# Altium PCB ArduinoUnoShield.PcbDoc
Units mm, origin at the board's own origin, x right, y up, seen from the top; angles counter-clockwise.
Board outline 68.58 x 53.34 mm, 3 copper layers (Top Layer, Mid-Layer 1, Bottom Layer); 62 components, 59 nets, 211 pads, 39 vias.
Unrouted connection lines stored in the file: 1.
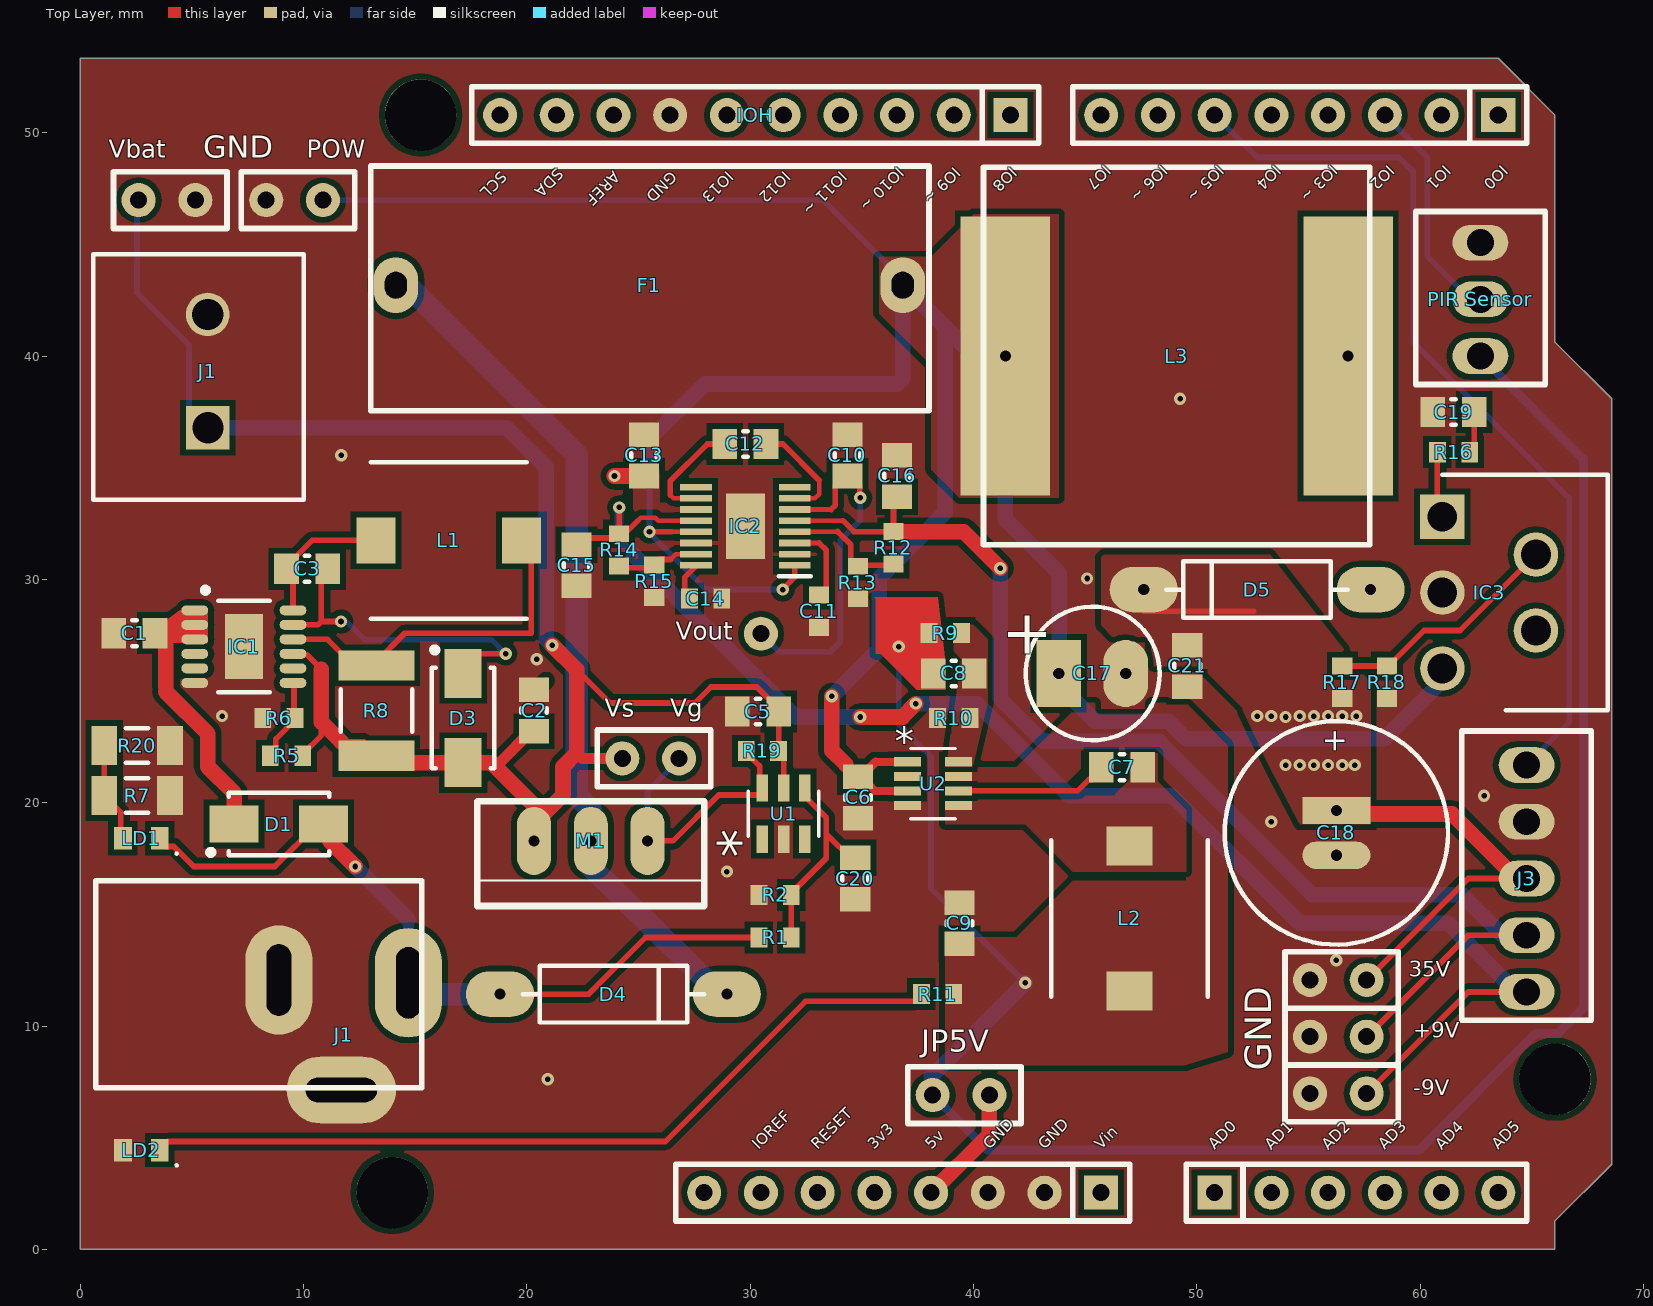
[diagram p0: Top Layer view]
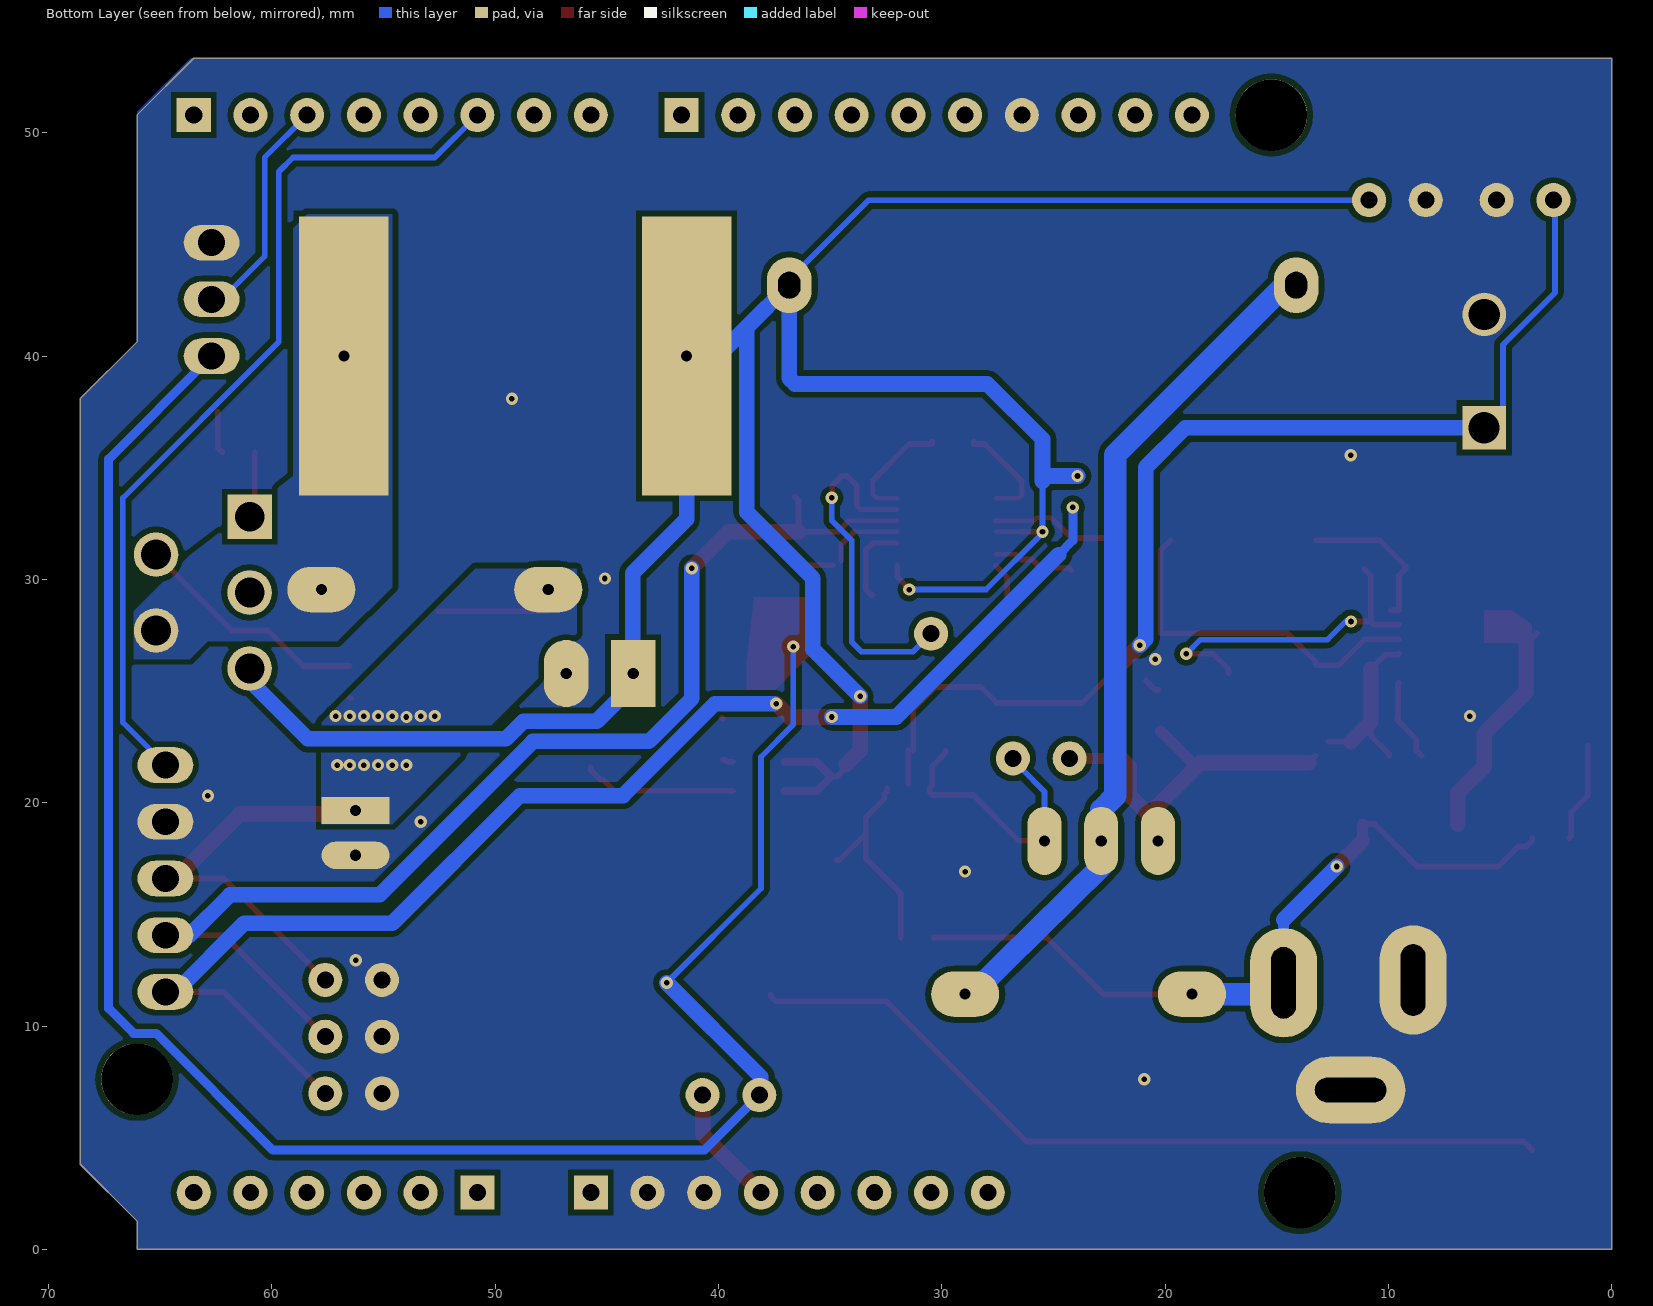
[diagram p1: Bottom Layer view, seen from below]
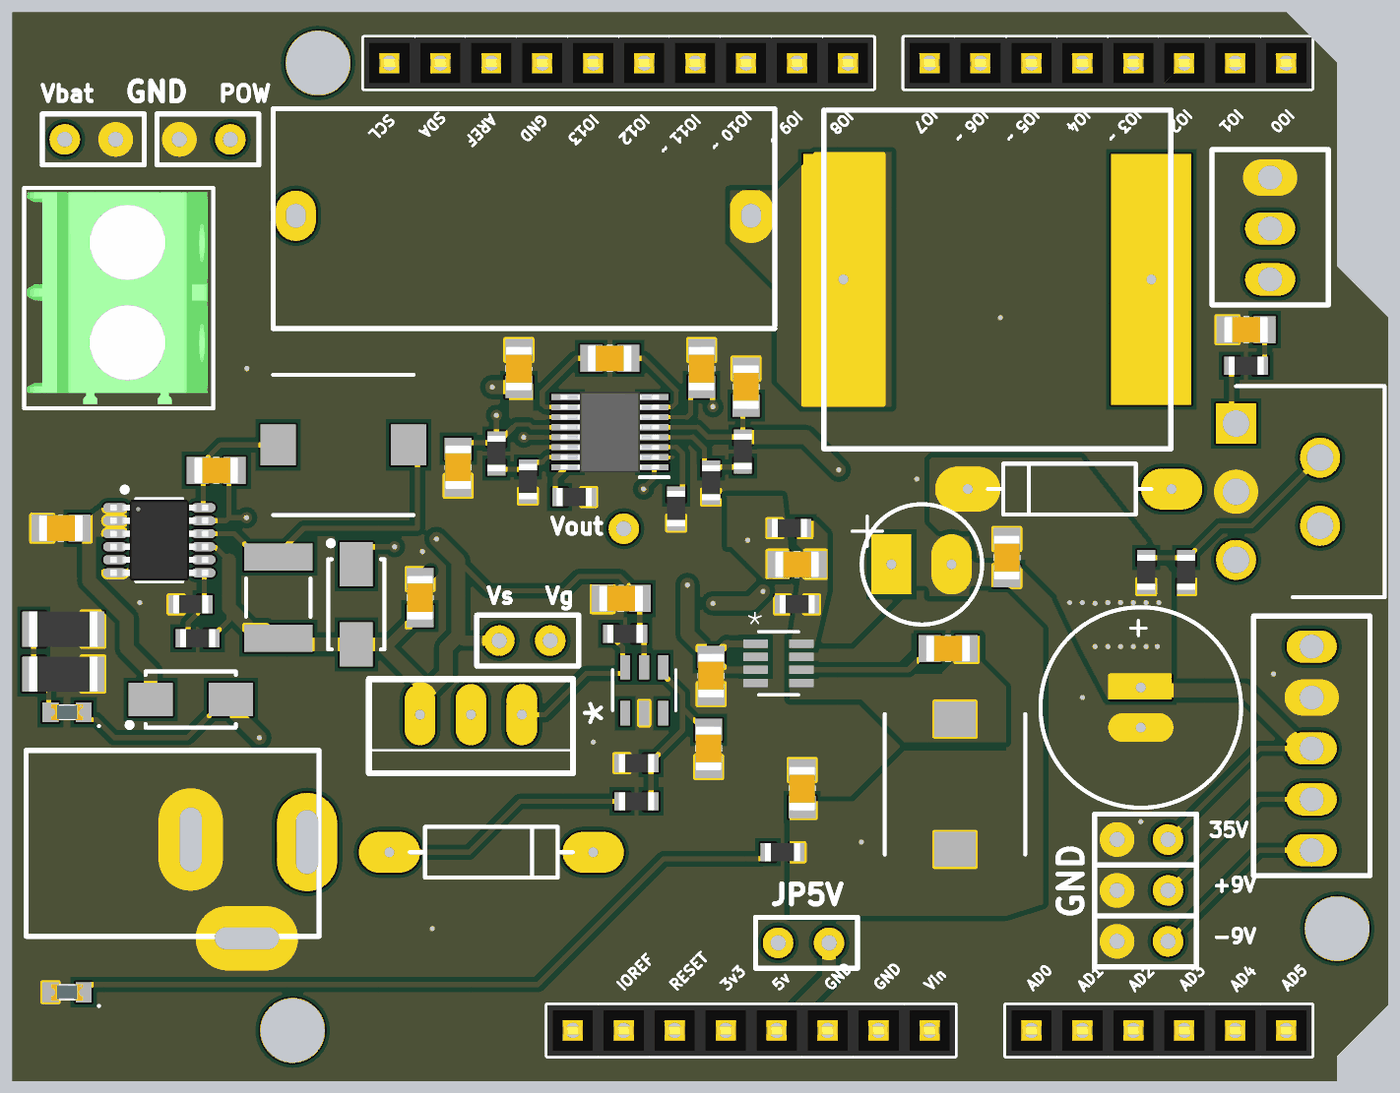
[diagram p2: 3D render of the assembled board from above, using the file's embedded part models]

## Layer stack, top to bottom
Top Solder: solder mask 0.0102, Solder Resist, Dk 3.5
Top Layer: signal copper 0.0356
Dielectric1: dielectric 0.32, FR-4, Dk 4.8
Mid-Layer 1: signal copper 0.0356
Dielectric2: dielectric 0.32, FR-4, Dk 4.8
Bottom Layer: signal copper 0.0356
Bottom Solder: solder mask 0.0102, Solder Resist, Dk 3.5

## Board outline
0,0 0,53.34 63.5,53.34 66.04,50.8 66.04,40.64 68.58,38.1 68.58,3.81 66.04,1.27 66.04,0

## Design rules (kind name [scope] priority, off if disabled: settings)
Clearance [All] p1: gap=0.254 ignorepadtopadclearanceinfootprint=TRUE except(0: Arc-Hole Track-Hole SMDPad-Hole THPad-Hole Via-Hole Fill-Hole Poly-Hole Region-Hole Text-Hole; 0.2: Arc-Arc Arc-Track Arc-SMDPad Track-Track Track-SMDPad)
PlaneConnect [All] p1: planeconnectstyle=Direct reliefexpansion=0.508 reliefentries=4 reliefconductorwidth=0.254 reliefairgap=0.254
PolygonConnect [All] p1: connectstyle=Direct reliefconductorwidth=0.254 reliefentries=4 polygonreliefangle="90 Angle" airgapwidth=0.254
RoomDefinition "Symetrical Power Supply" [InComponentClass('Symetrical Power Supply')] p1: confinementstyle=ConfineIn formatcopy=TRUE lockcomponents=FALSE outline 20.996,28.656 20.996,32.614 23.217,32.614 23.217,32.764 24.019,32.764 24.019,37.539 33.127,37.539 35.585,37.539 35.585,36.614 37.805,36.614 37.805,32.656 37.395,32.656 37.395,29.791 35.803,29.791 35.803,28.236 34.068,28.236 34.068,26.946 32.11,26.946 32.11,28.168 26.377,28.168 26.377,28.291 24.722,28.291 24.722,28.656
RoomDefinition Converter [InComponentClass('Converter')] p2: confinementstyle=ConfineIn formatcopy=TRUE lockcomponents=FALSE outline 0.851,3.404 0.851,5.474 29.277,27.537 37.106,28.574 40.364,28.574 62.536,27.537 62.536,5.956 4.671,3.404
RoomDefinition Boost [InComponentClass('Boost')] p3: confinementstyle=ConfineIn formatcopy=TRUE lockcomponents=FALSE outline 38.735,12.573 69.215,12.573 69.215,49.403 38.735,49.403
RoomDefinition ups [InComponentClass('ups')] p4: confinementstyle=ConfineIn formatcopy=TRUE lockcomponents=FALSE outline 0,0.635 51.435,0.635 51.435,52.705 0,52.705
RoutingVias [All] p1: holewidth=0.711 width=1.27 viastyle="Through Hole" minholewidth=0.711 minwidth=1.27 maxholewidth=0.711 maxwidth=1.27
SilkToSolderMaskClearance SilkscreenOverComponentPads [IsPad] p1: minsilkscreentomaskgap=0.254 clearancetoexposedcopper=TRUE
SolderMaskExpansion [All] p1: expansion=0.102
Width [All] p1: maxlimit=2 minlimit=0.2 preferedwidth=0.254 midlayer1_minwidth=0.254 bottomlayer_minwidth=0.254 minimp=50.000000 maximp=50.000000 favimp=50.000000
28 further rules are at their usual default settings.

## Classes and differential pairs
component class "Symetrical Power Supply": C10 C11 C12 C13 C14 C15 C16 IC2 R12 R13 R14 R15
component class Boost: C17 C18 C19 C21 D5 IC3 L3 R16 R17 R18
component class Converter: C6 C7 C8 C9 L2 LD2 R9 R10 R11 U2
component class ups: C1 C2 C3 C5 C20 D1 D3 D4 F1 IC1 J1 L1 LD1 M1 R1 R2 R5 R6 R7 R8 R19 R20 U1
component class ArduinoUnoShield: IOH J1 J3

## Components (designator, comment, footprint, x,y, rotation, side; value= is the part's Value field where it differs from the comment)
AD "AD" "Header 6x1 8.5mm" 50.8,2.54 r0 top locked
C1 "10uF" "0805 CAP" 2.42,27.595 r180 top
C2 "10uF" "0805 CAP" 20.32,24.13 r90 top
C3 "1uF" "0805 CAP" 10.16,30.48 r180 top
C5 "10uF" "0805 CAP" 30.346,24.084 r0 top
C6 "1uF" "0805 CAP" 34.832,20.241 r90 top
C7 "0.22uF" "0805 CAP" 46.645,21.59 r0 top
C8 "22pF" "0805 CAP" 39.116,25.796 r0 top
C9 "10uF" "0805 CAP" 39.37,14.605 r90 top
C10 "10uF" "0805 CAP" 34.356,35.56 r90 top
C11 "10nF" "0603 RES" 33.089,28.575 r90 top
C12 "1uF" "0805 CAP" 29.783,36.07 r180 top
C13 "10uF" "0805 CAP" 25.248,35.56 r270 top
C14 "10nF" "0603 RES" 28.006,29.147 r0 top
C15 "10uF" "0805 CAP" 22.225,30.635 r270 top
C16 "10uF" "0805 CAP" 36.576,34.635 r90 top
C17 "Cond pol radial" CAPP-6x3 43.815,25.79 r0 top value="100 µF"
C18 "Cond pol radial" CAPPR2-5x10 56.25,19.65 r270 top value=270µF
C19 "1uF" "0805 CAP" 61.5,37.5 r0 top
C20 "0.22µF" "0805 CAP" 34.707,16.609 r270 top
C21 "100nF" "0805 CAP" 49.571,26.13 r90 top
D1 "Diode" SMB 8.89,19.05 r180 top
D3 "Diode" SMB 17.145,23.796 r90 top
D4 "Diode Zener" DIODE-0.4 18.796,11.43 r0 top
D5 "Diode Zener" DIODE-0.4 57.785,29.548 r180 top
F1 "Fusible" Fuse_holder 14.13,43.18 r0 top value=6A
IC1 "LT3652" "MSOP12 - EP" 7.325,26.995 r0 top value=LTC3652
IC2 "LTC3260EMSE#PBF" SOP50P490X110-17N 29.783,32.385 r180 top
IC3 "LT1171CT" TO170P457X1022X2306-5P 60.998,32.815 r270 top
IOH "IOH" "Header 10x1 8.5mm" 41.656,50.8 r180 top locked
IOL "IOL" "Header 8x1 8.5mm" 63.5,50.8 r180 top locked
J1 "Connecteur 2" Jack_connector 14.69,11.938 r0 top
J1 "Connecteur 2" "Terminal block - 2 ways" 5.585,39.37 r90 top
J3 "Driver LED" "Connector 5" 64.77,11.529 r90 top
L1 "Inductance" INDPM7070X580N 16.5,31.75 r180 top value=25µ
L2 "Inductance" INDPM7070X580N 46.99,14.821 r270 top value=24µH
L3 "Inductance" Self100uH 41.426,40.005 r0 top value=47µH
LD1 "LED diode" LED_0603 2.73,18.415 r180 top
LD2 "green" LED_0603 2.73,4.445 r180 top
M1 "IPP096N03L" "TO-220 V" 25.4,18.294 r180 top value=NMOS
"PIR Sensor" "Connecteur 3" "Connector 3" 62.7,40.005 r90 top
POWER "POWER_UNO" "Header 8x1 8.5mm" 45.72,2.54 r180 top locked
R1 "Résistance" "0603 RES" 31.115,13.97 r180 top value=10k
R2 "Résistance" "0603 RES" 31.115,15.875 r0 top value=2.5k
R5 "Résistance" "0603 RES" 9.235,22.105 r0 top value="1.034 M"
R6 "Résistance" "0603 RES" 8.89,23.796 r0 top value=329.7k
R7 "Résistance" "1206 RES" 2.54,20.32 r180 top value=1680
R8 "Résistance" "1812 RES" 13.26,24.13 r90 top value=0.057
R9 "Résistance" "0603 RES" 38.735,27.595 r0 top value=300k
R10 "Résistance" "0603 RES" 39.116,23.796 r180 top value=100k
R11 "Résistance" "0603 RES" 38.391,11.43 r180 top value=220
R12 "Résistance" "0603 RES" 36.416,31.42 r270 top value=820k
R13 "Résistance" "0603 RES" 34.824,29.865 r270 top value=125.6k
R14 "Résistance" "0603 RES" 24.13,31.324 r270 top value=820k
R15 "Résistance" "0603 RES" 25.701,29.92 r270 top value=125.6k
R16 "Résistance" "0603 RES" 61.5,35.7 r180 top value=1k
R17 "Résistance" "0603 RES" 56.515,25.4 r270 top value=270k
R18 "Résistance" "0603 RES" 58.515,25.4 r90 top value=10k
R19 "Résistance" "0603 RES" 30.546,22.324 r180 top value=1M
R20 "Résistance" "1206 RES" 2.54,22.56 r180 top value=1680
U1 "LT6700HS6-1" *TSOT-23_S6 31.496,19.514 r90 top
U2 "LT3470ITS8" TSOT-23_TS8 38.192,20.857 r0 top value=Value

## Footprints (in the part's own frame and the unit in brackets; to place one, negate y for a bottom-side part, rotate by r counter-clockwise, add the part's x,y. Pads: shape width x height; smd on the part's side, far side on the other; paste and mask are expansions set on the pad)
"0603 RES" [mm] "RES0603 medium"
  rect 0.75x0.9 smd: 1(-0.725,0) 2(0.725,0)
  body extent -0.87,-0.45 0.87,0.45, height 0.4
"0805 CAP" [mm] "0805 cap"
  rect 1.1x1.35 smd: 1(-0.925,0) 2(0.925,0)
  silkscreen extent -0.1,-0.58 0.1,0.58, body extent -1.1,-0.65 1.1,0.65, height 0.8
"1206 RES" [mm] "RES1206 med"
  rect 1.15x1.75 smd: 1(-1.475,0) 2(1.475,0)
  silkscreen extent -0.5,-0.77 0.5,0.77, body extent -1.7,-0.87 1.7,0.87, height 0.55
"1812 RES" [mm] "1812 RES med small values"
  rect 1.35x3.4 smd: 1(-2.025,0) 2(2.025,0)
  silkscreen extent -0.95,-1.6 0.95,1.6, body extent -2.35,-1.7 2.35,1.7, height 0.6
*TSOT-23_S6 [mil]
  rect 48x20 smd: 1(-45,37.4) 2(-45,0) 3(-45,-37.4) 4(45,-37.4) 5(45,0) 6(45,37.4)
  silkscreen extent -40,-62 40,62
CAPP-6x3 [mm] "Capacitor, Electrolytic, Radial; Body 12 x 25 mm (Dia.xH typ); Pin Spacing 5 mm (typ)"
  rect 2x3 hole 0.5 paste+0 mask+0: 1(0,0)
  oval 2x3 hole 0.5 paste+0 mask+0: 2(3,0)
  silkscreen extent -1.47,-3 4.52,3
CAPPR2-5x10 [mil] "Capacitor, Electrolytic, Radial; Body 5 x 6.8 mm (Dia.xH typ); Pin Spacing 2 mm (typ)"
  rect 48x120 hole 19.68: 1(0,0)
  oval 48x120 hole 19.68: 2(78.74,0)
  silkscreen extent -157,-197 236,197
"Connector 3" [mm]
  oval 1.6x2.5 hole 1.2: 1(0,0) 2(2.54,0) 3(5.08,0)
  silkscreen extent -1.27,-2.9 6.48,2.9
"Connector 5" [mm]
  oval 1.6x2.5 hole 1.2: 1(0,0) 2(2.54,0) 3(5.08,0) 4(7.62,0) 5(10.16,0)
  silkscreen extent -1.27,-2.9 11.68,2.9
DIODE-0.4 [mil] "Tunnel Diode - Dependent Source Model; 2 Leads"
  oval 120x80 hole 19.68: 1(0,0) 2(400,0)
  silkscreen extent 40,-50 360,50
Fuse_holder [mm]
  oval 2x2.5 hole 1 slot 1.2 at 90 deg: 1(0,0) 2(22.7,0)
  silkscreen extent -1.12,-5.63 23.88,5.33
"Header 6x1 8.5mm" [mil] "Stackable 6 pin header"
  rect 60x60 hole 30: 1(0,0)
  round 60 hole 30: 2(100,0) 3(200,0) 4(300,0) 5(400,0) 6(500,0)
  silkscreen extent -50,-50 550,50, body extent -50,-50 550,50, height 335
"Header 8x1 8.5mm" [mil] "Stackable 8 pin header"
  rect 60x60 hole 30: 1(0,0)
  round 60 hole 30: 2(100,0) 3(200,0) 4(300,0) 5(400,0) 6(500,0) 7(600,0) 8(700,0)
  silkscreen extent -50,-50 750,50, body extent -50,-50 750,50, height 335
"Header 10x1 8.5mm" [mil] "Stackable 10 pin header"
  rect 60x60 hole 30: 1(0,0)
  round 60 hole 30: 2(100,0) 3(200,0) 4(300,0) 5(400,0) 6(500,0) 7(600,0) 8(700,0) 9(800,0) 10(900,0)
  silkscreen extent -50,-50 950,50, body extent -50,-50 950,50, height 335
INDPM7070X580N [mm]
  rect 1.75x2.05 smd: 1(-3.25,0) 2(3.25,0)
  silkscreen extent -3.5,-3.5 3.5,3.5
Jack_connector [mm]
  oval 3x4.9 hole 1.1 slot 3.2 at 90 deg: 1(0,0) 2(-5.8,0.127)
  oval 4.9x3 hole 1.1 slot 3.2 at 0 deg: 2(-3,-4.8)
  silkscreen extent -14,-4.7 0.6,4.57
LED_0603 [mm] "LED diode 0603"
  rect 0.8x1 smd: 1(-0.825,0) 2(0.825,0)
  silkscreen extent -1.64,0.64 -1.54,0.74, body extent -0.8,-0.4 0.8,0.4, height 0.6
"MSOP12 - EP" [mm] "MSOP, 12-Leads, Body 4,00x3,00mm, Pitch 0,65mm, Thermal Pad 2,90x1,70mm, IPC Medium Density"
  oval 1.2x0.45 smd: 1(-2.2,1.625) 2(-2.2,0.975) 3(-2.2,0.325) 4(-2.2,-0.325) 5(-2.2,-0.975) 6(-2.2,-1.625) 7(2.2,-1.625) 8(2.2,-0.975) 9(2.2,-0.325) 10(2.2,0.325) 11(2.2,0.975) 12(2.2,1.625)
  rect 1.7x2.9 smd: 13(0,0)
  silkscreen extent -1.85,-2.05 1.15,2.65, body extent -2.45,-2.02 2.45,2.02, height 1.1
Self100uH [mm] "Inductance 100uH 5,3A"
  rect 4x12.5 hole 0.5: 1(0,0) 2(15.35,0)
  silkscreen extent -0.97,-8.45 16.33,8.45
SMB [mm] "SMB diode SS14"
  rect 2.2x1.65 smd: 1(-2,0) 2(2,0)
  silkscreen extent -2.25,-1.4 3.17,1.4, body extent -2.25,-1.4 2.25,1.39, height 2.3
SOP50P490X110-17N [mm]
  rect 1.425x0.3 smd: 1(-2.212,1.75) 2(-2.212,1.25) 3(-2.212,0.75) 4(-2.212,0.25) 5(-2.212,-0.25) 6(-2.212,-0.75) 7(-2.212,-1.25) 8(-2.212,-1.75) 9(2.212,-1.75) 10(2.212,-1.25) 11(2.212,-0.75) 12(2.212,-0.25) 13(2.212,0.25) 14(2.212,0.75) 15(2.212,1.25) 16(2.212,1.75)
  rect 1.753x2.947 smd: 17(0,0)
  silkscreen extent -2.93,2.25 -1.5,2.25, body extent -2.45,-2.02 2.45,2.02, height 1.1
"Terminal block - 2 ways" [mm]
  rect 1.95x1.95 / inner round 1.95 / far side rect 1.95x1.95 hole 1.4: 1(-2.58,-0.13)
  round 1.95 hole 1.4: 2(2.5,-0.12)
  silkscreen extent -5.8,-4.43 5.2,5, body extent -5.59,-4.15 4.98,4.85, height 12.4
TO170P457X1022X2306-5P [mm]
  rect 1.995x1.995 / inner round 1.995 / far side rect 1.995x1.995 hole 1.33: 1(0,0)
  round 1.995 hole 1.33: 2(1.7,4.191) 3(3.4,0) 4(5.1,4.191) 5(6.8,0)
  silkscreen extent -1.87,0 8.67,7.4
"TO-220 V" [mil] "TO-220 Vertical"
  oval 60x120 hole 19.68: 1(0,0) 2(100,0) 3(200,0)
  silkscreen extent -100,-70 300,115
TSOT-23_TS8 [mm]
  rect 1.208x0.416 smd paste+0 mask+0: 1(-1.143,0.975) 2(-1.143,0.325) 3(-1.143,-0.325) 4(-1.143,-0.975) 5(1.143,-0.975) 6(1.143,-0.325) 7(1.143,0.325) 8(1.143,0.975)
  silkscreen extent -1,-1.57 1,1.57, body extent 0,0 0.25,0.25, height 0.25

## Part data
AD: Supplier Part Number 1=2699089, Supplier 1=Arrow, Supplier 2=Digi-Key, Supplier 3=Arrow, Supplier 4=Arrow, Supplier Part Number 2=SAM1198-06-ND, Supplier Part Number 3=2699088, Supplier Part Number 4=2699075
C1 C2 C9 C10 C13 C15 C16: library part 1uF/0805, Capacitance="10 µF", Case Size/Dimension=0805, Dielectric=X7R, Manufacturer=Murata, Manufacturer Part Number=GCM21BR7YA105KA55L, Rated Voltage="35 V", Supplier Part Number 1=2494199, Tolerance (%)="±10 %", ComponentLink1Description=https://datasheet.ciiva.com/11616/product-11616620.pdf, ComponentLink1URL=https://datasheet.ciiva.com/11616/product-11616620.pdf, ComponentLink2Description=https://datasheet.ciiva.com/138/s0717e-138752.pdf, ComponentLink2URL=https://datasheet.ciiva.com/138/s0717e-138752.pdf, ComponentLink3Description=https://datasheet.ciiva.com/138/s0717e-138753.pdf, ComponentLink3URL=https://datasheet.ciiva.com/138/s0717e-138753.pdf, ComponentLink4Description=https://datasheet.ciiva.com/18183/getdatasheetpartid-251151-18183719.pdf, ComponentLink4URL=https://datasheet.ciiva.com/18183/getdatasheetpartid-251151-18183719.pdf, ComponentLink5Description=https://datasheet.ciiva.com/138/s0717e-138751.pdf, ComponentLink5URL=https://datasheet.ciiva.com/138/s0717e-138751.pdf, Pricing 1="5=0.391, 50=0.21, 250=0.162, 500=0.111 (EUR)", Stock 1=3630, Supplier 1=Farnell
C3 C5 C6 C12 C19: library part 1uF/0805, Capacitance="1 µF", Case Size/Dimension=0805, Dielectric=X7R, Manufacturer=Murata, Manufacturer Part Number=GCM21BR7YA105KA55L, Rated Voltage="35 V", Supplier Part Number 1=2494199, Tolerance (%)="±10 %", ComponentLink1Description=https://datasheet.ciiva.com/11616/product-11616620.pdf, ComponentLink1URL=https://datasheet.ciiva.com/11616/product-11616620.pdf, ComponentLink2Description=https://datasheet.ciiva.com/138/s0717e-138752.pdf, ComponentLink2URL=https://datasheet.ciiva.com/138/s0717e-138752.pdf, ComponentLink3Description=https://datasheet.ciiva.com/138/s0717e-138753.pdf, ComponentLink3URL=https://datasheet.ciiva.com/138/s0717e-138753.pdf, ComponentLink4Description=https://datasheet.ciiva.com/18183/getdatasheetpartid-251151-18183719.pdf, ComponentLink4URL=https://datasheet.ciiva.com/18183/getdatasheetpartid-251151-18183719.pdf, ComponentLink5Description=https://datasheet.ciiva.com/138/s0717e-138751.pdf, ComponentLink5URL=https://datasheet.ciiva.com/138/s0717e-138751.pdf, Pricing 1="5=0.391, 50=0.21, 250=0.162, 500=0.111 (EUR)", Stock 1=3630, Supplier 1=Farnell
C7: library part 1uF/0805, Capacitance="0.22 µF", Case Size/Dimension=0805, Dielectric=X7R, Manufacturer=Murata, Manufacturer Part Number=GCM21BR7YA105KA55L, Rated Voltage="35 V", Supplier Part Number 1=2494199, Tolerance (%)="±10 %", ComponentLink1Description=https://datasheet.ciiva.com/11616/product-11616620.pdf, ComponentLink1URL=https://datasheet.ciiva.com/11616/product-11616620.pdf, ComponentLink2Description=https://datasheet.ciiva.com/138/s0717e-138752.pdf, ComponentLink2URL=https://datasheet.ciiva.com/138/s0717e-138752.pdf, ComponentLink3Description=https://datasheet.ciiva.com/138/s0717e-138753.pdf, ComponentLink3URL=https://datasheet.ciiva.com/138/s0717e-138753.pdf, ComponentLink4Description=https://datasheet.ciiva.com/18183/getdatasheetpartid-251151-18183719.pdf, ComponentLink4URL=https://datasheet.ciiva.com/18183/getdatasheetpartid-251151-18183719.pdf, ComponentLink5Description=https://datasheet.ciiva.com/138/s0717e-138751.pdf, ComponentLink5URL=https://datasheet.ciiva.com/138/s0717e-138751.pdf, Pricing 1="5=0.391, 50=0.21, 250=0.162, 500=0.111 (EUR)", Stock 1=3630, Supplier 1=Farnell
C8: library part 1uF/0805, Capacitance="22 pF", Case Size/Dimension=0805, Dielectric=X7R, Manufacturer=Murata, Manufacturer Part Number=GCM21BR7YA105KA55L, Rated Voltage="35 V", Supplier Part Number 1=2494199, Tolerance (%)="±10 %", ComponentLink1Description=https://datasheet.ciiva.com/11616/product-11616620.pdf, ComponentLink1URL=https://datasheet.ciiva.com/11616/product-11616620.pdf, ComponentLink2Description=https://datasheet.ciiva.com/138/s0717e-138752.pdf, ComponentLink2URL=https://datasheet.ciiva.com/138/s0717e-138752.pdf, ComponentLink3Description=https://datasheet.ciiva.com/138/s0717e-138753.pdf, ComponentLink3URL=https://datasheet.ciiva.com/138/s0717e-138753.pdf, ComponentLink4Description=https://datasheet.ciiva.com/18183/getdatasheetpartid-251151-18183719.pdf, ComponentLink4URL=https://datasheet.ciiva.com/18183/getdatasheetpartid-251151-18183719.pdf, ComponentLink5Description=https://datasheet.ciiva.com/138/s0717e-138751.pdf, ComponentLink5URL=https://datasheet.ciiva.com/138/s0717e-138751.pdf, Pricing 1="5=0.391, 50=0.21, 250=0.162, 500=0.111 (EUR)", Stock 1=3630, Supplier 1=Farnell
C11 C14: library part 1uF/0805, Capacitance="10 nF", Case Size/Dimension=0805, Dielectric=X7R, Manufacturer=Murata, Manufacturer Part Number=GCM21BR7YA105KA55L, Rated Voltage="35 V", Supplier Part Number 1=2494199, Tolerance (%)="±10 %", ComponentLink1Description=https://datasheet.ciiva.com/11616/product-11616620.pdf, ComponentLink1URL=https://datasheet.ciiva.com/11616/product-11616620.pdf, ComponentLink2Description=https://datasheet.ciiva.com/138/s0717e-138752.pdf, ComponentLink2URL=https://datasheet.ciiva.com/138/s0717e-138752.pdf, ComponentLink3Description=https://datasheet.ciiva.com/138/s0717e-138753.pdf, ComponentLink3URL=https://datasheet.ciiva.com/138/s0717e-138753.pdf, ComponentLink4Description=https://datasheet.ciiva.com/18183/getdatasheetpartid-251151-18183719.pdf, ComponentLink4URL=https://datasheet.ciiva.com/18183/getdatasheetpartid-251151-18183719.pdf, ComponentLink5Description=https://datasheet.ciiva.com/138/s0717e-138751.pdf, ComponentLink5URL=https://datasheet.ciiva.com/138/s0717e-138751.pdf, Pricing 1="5=0.391, 50=0.21, 250=0.162, 500=0.111 (EUR)", Stock 1=3630, Supplier 1=Farnell
C17 C18: "Condensateur polatisé", Designer="ECAM 2004", Type="Condensateur polarisé debout"
C20: library part 1uF/0805, Capacitance="220 nF", Case Size/Dimension=0805, Dielectric=X7R, Manufacturer=Murata, Manufacturer Part Number=GCM21BR7YA105KA55L, Rated Voltage="35 V", Supplier Part Number 1=2494199, Tolerance (%)="±10 %", ComponentLink1Description=https://datasheet.ciiva.com/11616/product-11616620.pdf, ComponentLink1URL=https://datasheet.ciiva.com/11616/product-11616620.pdf, ComponentLink2Description=https://datasheet.ciiva.com/138/s0717e-138752.pdf, ComponentLink2URL=https://datasheet.ciiva.com/138/s0717e-138752.pdf, ComponentLink3Description=https://datasheet.ciiva.com/138/s0717e-138753.pdf, ComponentLink3URL=https://datasheet.ciiva.com/138/s0717e-138753.pdf, ComponentLink4Description=https://datasheet.ciiva.com/18183/getdatasheetpartid-251151-18183719.pdf, ComponentLink4URL=https://datasheet.ciiva.com/18183/getdatasheetpartid-251151-18183719.pdf, ComponentLink5Description=https://datasheet.ciiva.com/138/s0717e-138751.pdf, ComponentLink5URL=https://datasheet.ciiva.com/138/s0717e-138751.pdf, Pricing 1="5=0.391, 50=0.21, 250=0.162, 500=0.111 (EUR)", Stock 1=3630, Supplier 1=Farnell
C21: library part 1uF/0805, Capacitance="100 nF", Case Size/Dimension=0805, Dielectric=X7R, Manufacturer=Murata, Manufacturer Part Number=GCM21BR7YA105KA55L, Rated Voltage="35 V", Supplier Part Number 1=2494199, Tolerance (%)="±10 %", ComponentLink1Description=https://datasheet.ciiva.com/11616/product-11616620.pdf, ComponentLink1URL=https://datasheet.ciiva.com/11616/product-11616620.pdf, ComponentLink2Description=https://datasheet.ciiva.com/138/s0717e-138752.pdf, ComponentLink2URL=https://datasheet.ciiva.com/138/s0717e-138752.pdf, ComponentLink3Description=https://datasheet.ciiva.com/138/s0717e-138753.pdf, ComponentLink3URL=https://datasheet.ciiva.com/138/s0717e-138753.pdf, ComponentLink4Description=https://datasheet.ciiva.com/18183/getdatasheetpartid-251151-18183719.pdf, ComponentLink4URL=https://datasheet.ciiva.com/18183/getdatasheetpartid-251151-18183719.pdf, ComponentLink5Description=https://datasheet.ciiva.com/138/s0717e-138751.pdf, ComponentLink5URL=https://datasheet.ciiva.com/138/s0717e-138751.pdf, Pricing 1="5=0.391, 50=0.21, 250=0.162, 500=0.111 (EUR)", Stock 1=3630, Supplier 1=Farnell
D4: "Diode Zéner", Voltage=0.5, Designer="ECAM 2005", Type="Diode Zéner 10 V"
D5: "Diode Zéner", Voltage=10V, Designer="ECAM 2005", Type="Diode Zéner 10 V"
IC1: library part LTC3652, Manufacturer="Analog Devices / Linear Technology", Manufacturer Part Number=LT3652EMSE#PBF, Operating Temperature="-40°C ~ 125°C", Package / Case="12-TSSOP (0.118\", 3.00mm Width) Exposed Pad", Standard Package=37, Supplier Device Package=12-MSOP-EP, Supplier Part Number 1=1839126, Voltage - Supply="4.95 V ~ 32 V", Battery Chemistry="Lead Acid, LiFePO4, Li-Ion, Li-Pol, NiCd, NiMH", Category="Integrated Circuits (ICs)", ComponentLink1Description=https://datasheet.ciiva.com/15114/getdatasheetpartid-367678-15114671.pdf, ComponentLink1URL=https://datasheet.ciiva.com/15114/getdatasheetpartid-367678-15114671.pdf, ComponentLink2Description=https://datasheet.ciiva.com/1932/28522-1932092.pdf, ComponentLink2URL=https://datasheet.ciiva.com/1932/28522-1932092.pdf, ComponentLink3Description=https://datasheet.ciiva.com/1139/1692510-1139705.pdf, ComponentLink3URL=https://datasheet.ciiva.com/1139/1692510-1139705.pdf, Dynamic Catalog="Charge Management, Specialized", Family="PMIC - Battery Management", Featured Product="Energy Harvesting Power Products", For Use With="DC1568A-ND / - BOARD BATTERY CHARGER SOLAR PWR / DC1688A-ND / - EVAL BOARD BATT CHARGER LT3652", Function="Charge Management, Solar", Mounting Type="Surface Mount", Online Catalog="Charge Management, Specialized", Other Names=LT3652EMSEPBF, Other Related Documents="Power-Tracking Batt-Charger Article /  / Designing a Solar Cell Battery Charger", Packaging=Tube, Product Training Modules="LT3652 Multi-Chemistry Battery Charger for Solar Power", Reference Design Library="DC1568A(#1):  2 Cell, 8.2V, 2A Max, Solar /  / DC1568A(#2):  2 Cell, 8.2V, 2A Max, Solar", Series=-, Stock 1=0, Supplier 1=Farnell
IC2: "Integrated Circuit", Manufacturer_Name="Linear Technology", Mouser Part Number=584-LTC3260EMSE#PBF, RS Part Number=8516768P, Datasheet Link=http://cds.linear.com/docs/en/datasheet/3260fa.pdf, Height=1.1mm, Manufacturer_Part_Number=LTC3260EMSE#PBF, Mouser Price/Stock=https://www.mouser.com/Search/Refine.aspx?Keyword=584-LTC3260EMSE%23PBF, RS Price/Stock=http://uk.rs-online.com/web/p/products/8516768P
IC3: library part LT1171CT#PBF, "Integrated Circuit", Manufacturer_Name="Linear Technology", Mouser Part Number=584-LT1171CT#PBF, RS Part Number=5455001, Datasheet Link=http://docs-emea.rs-online.com/webdocs/13ec/0900766b813ec9fd.pdf, Height=4.572mm, Manufacturer_Part_Number=LT1171CT#PBF, Mouser Price/Stock=https://www.mouser.com/Search/Refine.aspx?Keyword=584-LT1171CT%23PBF, RS Price/Stock=https://uk.rs-online.com/web/p/products/5455001
IOH: Supplier Part Number 1=2698803S4475693N1004, Supplier 1=Arrow, Supplier 2=Digi-Key, Supplier 3=Arrow, Supplier Part Number 2=SAM1198-10-ND, Supplier Part Number 3=2698789
IOL POWER: Supplier Part Number 1=SAM1198-08-ND, Supplier 1=Digi-Key, Supplier 2=Arrow, Supplier 3=Arrow, Supplier 4=Arrow, Supplier Part Number 2=2698939, Supplier Part Number 3=2698940, Supplier Part Number 4=2698925
J1 J1: "Connecteur", Designer="ECAM 2005", Type="Connecteur à vis"
J3: library part "Connecteur 5", "Connecteur", Designer="ECAM 2004"
LD1: "LED", Forward Current If=25mA, Forward Voltage=3V, LED Colour=Red, Manufacturer=Multicomp, Manufacturer Part Number=703-0112, Supplier Part Number 1=2112124, Automotive Qualification Standard=-, Bulb Size=-, ComponentLink1Description=https://datasheet.ciiva.com/1244/1758066-1244070.pdf, ComponentLink1URL=https://datasheet.ciiva.com/1244/1758066-1244070.pdf, ComponentLink2Description=https://datasheet.ciiva.com/23621/1626779-23621468.pdf, ComponentLink2URL=https://datasheet.ciiva.com/23621/1626779-23621468.pdf, LED Mounting=SMD, Lens Shape=Rectangular, Luminous Intensity=15mcd, Packaging=Each, Pricing 1="5=0.163, 25=0.139, 100=0.108, 250=0.0887, 500=0.0813, 1000=0.075 (EUR)", Product Range=-, Stock 1=627, Supplier 1=Farnell, Viewing Angle=140°, Wavelength Typ=643nm
LD2: library part "LED diode", "LED green", Forward Current If=20mA, Forward Voltage=1.8V, LED Colour=Red, Manufacturer=Multicomp, Manufacturer Part Number=703-0112, Supplier Part Number 1=2112124, Automotive Qualification Standard=-, Bulb Size=-, ComponentLink1Description=https://datasheet.ciiva.com/1244/1758066-1244070.pdf, ComponentLink1URL=https://datasheet.ciiva.com/1244/1758066-1244070.pdf, ComponentLink2Description=https://datasheet.ciiva.com/23621/1626779-23621468.pdf, ComponentLink2URL=https://datasheet.ciiva.com/23621/1626779-23621468.pdf, LED Mounting=SMD, Lens Shape=Rectangular, Luminous Intensity=15mcd, Packaging=Each, Pricing 1="5=0.163, 25=0.139, 100=0.108, 250=0.0887, 500=0.0813, 1000=0.075 (EUR)", Product Range=-, Stock 1=627, Supplier 1=Farnell, Viewing Angle=140°, Wavelength Typ=643nm
M1: library part NMOS-IPP096, "MOSFET", Designer="ECAM 2002", Type="Mosfet canal N"
R1 R2 R5 R6 R7 R8 R9 R10 R11 R12 R13 R14 R15 R16 R17 R18 R19 R20: "Résistance standard", Designer="ECAM 2005", Type="Résistance standard"
U1: "Analog Comparators LT6700 - Micropower, Low Voltage, Dual Comparator with 400mV Reference", Package=None, Availability=Unavailable, MF="Linear Technology", MP=LT6700HS6-1, Price=None, SnapEDA_Link=https://www.snapeda.com/parts/LT6700HS6-1/Analog%20Devices/view-part/?ref=snap
U2: "No Description Available", Copyright="Copyright (C) 2018 Accelerated Designs. All rights reserved", Manufacturer_Part_Number=LT3470ITS8, RefDes=RefDes, Type=DEV, Vendor="Linear Technology"
D1 D3: Designer="ECAM 2003", Type="Diode standard"
F1: Designer="ECAM 2004", Type=Fusible
L1 L2 L3: Designer="ECAM 2003"

## Free pads (board coordinates)
  round 3.2 hole 3.2: 0(13.97,2.54) 0(15.24,50.8) 0(66.04,7.62)
  round 1.524 hole 0.762: 1(2.611,46.99) 1(8.326,46.99) 1(24.272,21.987) 1(38.171,6.91) 1(55.07,6.985) 1(55.07,9.525) 1(55.07,12.065) 2(5.151,46.99) 2(10.866,46.99) 2(26.812,21.987) 2(40.711,6.91) 2(57.61,6.985) 2(57.61,9.525) 2(57.61,12.065) 3(30.48,27.571)

## Via types
v1: diameter 0.55, hole 0.25, Top Layer to Bottom Layer, tented both sides, 39 vias

## Nets (pads, with @x,y where several pads share a name; then routed paths per layer and width w, separated by ;. In a path a pad name is that pad's centre, name@x,y a point inside that pad or via, vN(x,y) a via of type N, cw(c..) or ccw(c..) an arc to the next point about the centre after c; other vN are vias at no path point)
3V3: POWER.5
5V: "PIR Sensor.1" C8.1 C9.1 L2.2 pad.1@38.171,6.91 pad.2@40.711,6.91 POWER.4 R9.1 R11.1 U2.7 | length 93.8
  Top Layer w0.7: POWER.4 40.711,5.151 pad.2@40.711,6.91
  Bottom Layer w0.254: v1(36.657,26.995) 36.657,23.495 38.1,22.053 38.1,16.158 v1(42.32,11.938) ; pad.2@40.491,6.91 pad.2@40.711,6.91 ; 62.7,40.005 62.865,39.84
  Bottom Layer w0.4: pad.1@38.171,6.91 40.636,4.445 41.426,4.445 59.96,4.445 65.189,9.674 66.189,9.674 67.31,10.795 67.31,35.395 62.865,39.84
  Bottom Layer w0.7: pad.1@38.171,6.91 38.1,6.981 38.1,7.718 v1(42.32,11.938)
19V: D1.1 D4.1 J1.1@14.69,11.938 LD1.1 R1.2 | length 34.5
  Top Layer w0.254: LD1.1 3.555,18.315 3.828,18.042 4.183,18.042 5.08,17.145 8.71,17.145 10.615,19.05 D1.1 D1.1@11.165,19.05 ; J1.1@14.69,13.42 14.69,11.938 J1.1@15.198,11.43 ; D4.1 22.77,11.43 25.31,13.97 R1.2
  Top Layer w0.5: D1.1@11.165,18.294 D1.1@11.165,19.05
  Top Layer w0.7: D1.1@11.165,18.294 v1(12.314,17.145)
  Bottom Layer w0.5: J1.1@14.69,13.42 14.69,14.769
  Bottom Layer w0.7: v1(12.314,17.145) 14.69,14.769
  Bottom Layer w1: J1.1@15.198,11.43 D4.1
AD0: AD.1
AD1: AD.2
AD2: AD.3
AD3: AD.4
AD4: AD.5
AD5: AD.6
AREF: IOH.8
GND: "PIR Sensor.3" C1.2 C2.2 C5.1 C6.1 C9.2 C10.2 C11.1 C13.1 C14.2 C15.2 C16.2 C17.2 C18.2 C19.1 C20.2 C21.1 IC1.6 IC1.13 IC2.2 IC2.14 IC2.17 IC3.3 IOH.7 J1.2 J3.4 LD2.2 pad.1@8.326,46.99 pad.1@55.07,6.985 pad.1@55.07,9.525 pad.1@55.07,12.065 pad.2@5.151,46.99 POWER.2 POWER.3 R2.1 R6.1 R7.1 R10.2 R13.2 R15.2 R18.1 R20.1 U1.2 U2.4 | length 0.7
  Top Layer w0.254: C2.2 20.442,25.055 C2.2@20.865,25.478
  other v1: 20.933,7.62 56.25,12.952 28.956,16.92 53.34,19.149 62.865,20.32 6.35,23.885 20.442,26.432 45.085,30.046 11.69,35.561 49.25,38.1
IO0: IOL.1
IO1: IOL.2
IO2: "PIR Sensor.2" IOL.3 | length 10.3
  Bottom Layer w0.254: IOL.3 60.325,48.895 60.325,44.47 62.25,42.545 62.7,42.545
IO3: IOL.4
IO4: IOL.5
IO5: IOL.6 J3.5 | length 40.2
  Bottom Layer w0.254: IOL.6 52.705,48.895 59.055,48.895 59.69,48.26 59.69,40.64 66.675,33.655 66.675,23.594 J3.5
IO6: IOL.7
IO7: IOL.8
IO8: IOH.1
IO9: IOH.2
IO10: IOH.3
IO11: IOH.4
IO12: IOH.5
IO13: IOH.6
IOREF: POWER.7
NetC1_1: C1.1 D1.2 IC1.1 IC1.2 IC1.3 | length 9.8
  Top Layer w0.254: C1.1 C1.1@3.828,27.112
  Top Layer w0.7: 3.828,24.974 5.705,23.097 5.705,21.618 6.89,20.433 D1.2 ; 3.828,25.196 C1.1@3.828,27.112
NetC2_1: C2.1 C5.2 D3.1 IC1.9 J1.1@5.715,36.79 M1.3 pad.1@2.611,46.99 pad.1@24.272,21.987 R5.2 R8.1 R19.1 U1.5 | length 81.1
  Top Layer w0.254: IC1.9 9.563,26.632 10.145,26.632 10.795,25.982 ; R5.2 9.96,22.18 10.795,23.015 10.795,23.62 ; R8.1@11.675,22.74 R8.1@12.7,22.74 ; R8.1 R8.1@13.569,21.796 ; 18.415,21.796 18.786,21.796 ; C2.1@20.195,23.205 C2.1 ; 22.225,25.972 23.725,24.472 27.528,24.472 28.239,25.183 30.296,25.183 31.271,24.209 C5.2 R19.1 ; U1.5@31.496,20.828 R19.1@31.496,22.359
  Top Layer w0.5: J1.1@5.4,36.79 J1.1@5.715,36.79 ; 18.786,21.796 C2.1@20.195,23.205 ; M1.3 20.32,19.056 20.32,19.891 ; 22.225,22.225 22.463,21.987 pad.1@24.272,21.987
  Top Layer w0.7: 10.795,25.982 10.795,23.62 R8.1@11.675,22.74 ; R8.1@13.569,21.796 D3.1 18.415,21.796 20.32,19.891 ; M1.3@20.32,19.056 21.617,20.353 21.617,21.617 22.225,22.225 22.225,25.972 v1(21.139,27.058)
  Bottom Layer w0.254: pad.1@2.54,46.99 2.54,42.843 4.867,40.516 4.867,37.638 J1.1@5.715,36.79
  Bottom Layer w0.7: J1.1@5.715,36.79 19.105,36.79 20.865,35.03 20.865,27.332 v1(21.139,27.058)
NetC3_1: C3.1 D3.2 IC1.11 | length 15
  Top Layer w0.254: IC1.11 10.646,27.97 10.795,28.119 ; C3.1 10.795,30.19 10.795,28.119 ; v1(11.675,28.119) 10.795,28.119 ; D3.2 17.145,25.972 17.843,26.67 v1(19.05,26.67)
  Bottom Layer w0.254: v1(11.675,28.119) 11.916,28.119 12.73,27.305 18.415,27.305 v1(19.05,26.67)
NetC3_2: C3.2 IC1.12 L1.2 | length 7
  Top Layer w0.254: IC1.12@9.9,28.62 IC1.12 9.525,30.19 C3.2 9.235,30.605 10.38,31.75 L1.2@13.26,31.75
NetC7_1: C7.1 U2.6 | length 6.9
  Top Layer w0.254: U2.6 44.662,20.532 45.172,21.042 45.297,21.042 45.72,21.465 C7.1
NetC7_2: C7.2 L2.1 U2.5
NetC8_2: C8.2 R9.2 R10.1 U2.8 | length 0.6
  Top Layer w0.254: U2.8 39.612,21.832 39.692,21.913 U2.8@39.812,21.913 ; R10.1@39.812,23.767 R10.1
NetC10_1: C10.1 IC2.6 pad.3 | length 15.7
  Top Layer w0.21: IC2.6 33.625,33.135
  Top Layer w0.254: 33.625,33.135 33.808,33.318 33.808,34.212 34.231,34.635 C10.1 34.481,34.635 34.904,34.212 34.904,33.676 v1(34.925,33.655)
  Bottom Layer w0.254: pad.3 31.288,26.763 33.601,26.763 34.036,27.198 34.036,31.75 34.925,32.639 v1(34.925,33.655)
NetC11_2: C11.2 IC2.3 | length 3.7
  Top Layer w0.21: IC2.3 33.089,31.635
  Top Layer w0.254: C11.2 33.161,29.3 33.409,29.548 33.409,31.315 33.089,31.635
NetC12_1: C12.1 IC2.7 | length 5.3
  Top Layer w0.21: IC2.7 32.896,33.635 33.089,33.827 33.089,34.443
  Top Layer w0.254: C12.1@30.425,36.195 30.425,36.07 C12.1 31.461,36.07 33.089,34.443
NetC12_2: C12.2 IC2.10 | length 4.8
  Top Layer w0.21: 26.416,33.784 26.565,33.635 IC2.10
  Top Layer w0.254: 26.416,33.784 26.416,34.405 28.081,36.07 28.575,36.07 C12.2@28.575,36.195
NetC14_1: C14.1 IC2.16 | length 1.7
  Top Layer w0.254: C14.1@27.063,29.147 27.063,30.096 IC2.16@27.571,30.604
NetC15_1: C15.1 IC2.12 J3.1 pad.2@57.61,6.985 R14.1 | length 67.3
  Top Layer w0.21: 24.971,32.635 25.105,32.769 25.754,32.769 25.888,32.635 IC2.12
  Top Layer w0.254: C15.1 22.525,31.86 R14.1@24.196,31.86 ; v1(24.13,33.226) R14.1 24.13,31.926 R14.1@24.196,31.86 ; 24.971,32.635 R14.1@24.196,31.86 ; pad.2@57.61,6.985 62.154,11.529 J3.1
  Top Layer w0.7: v1(34.925,23.842) 36.818,23.842 v1(37.418,24.442)
  Bottom Layer w0.254: v1@37.465,24.472 v1@37.495,24.442 ; J3.1@64.32,11.529 J3.1
  Bottom Layer w0.4: v1(24.13,33.226) 24.13,31.75 24.765,31.115
  Bottom Layer w0.7: 24.765,31.115 32.038,23.842 v1(34.925,23.842) ; v1@37.495,24.442 40.154,24.442 44.276,20.32 48.895,20.32 54.61,14.605 61.244,14.605 J3.1@64.32,11.529
NetC16_1: C16.1 IC2.5 J3.2 pad.2@57.61,9.525 R12.1 | length 54.6
  Top Layer w0.21: IC2.5 34.151,32.635
  Top Layer w0.254: 34.151,32.635 34.641,32.145 R12.1 36.416,33.55 C16.1 ; pad.2@57.61,9.525 62.154,14.069 J3.2
  Top Layer w0.7: R12.1 39.555,32.145 v1(41.192,30.508)
  Bottom Layer w0.7: v1(41.192,30.508) 41.192,24.677 43.119,22.75 48.309,22.75 55.184,15.875 61.878,15.875 63.684,14.069 J3.2
NetC18_1: C18.1 C21.2 D5.2 J3.3 pad.2@57.61,12.065 R17.2 | length 23.7
  Top Layer w0.254: D5.2@47.625,28.575 52.54,28.575 ; R17.2@56.44,24.675 R17.2 ; pad.2@57.61,12.065 62.154,16.609 64.32,16.609 J3.3
  Top Layer w0.7: C18.1@56.25,19.5 61.429,19.5 J3.3@64.32,16.609
  Bottom Layer w0.7: J3.3@64.374,16.609 J3.3
  other v1: 53.975,21.689 54.613,21.689 55.245,21.689 55.88,21.689 56.515,21.689 57.076,21.689 53.975,23.842 52.705,23.885 53.34,23.885 54.613,23.885 55.245,23.885 55.88,23.885 56.515,23.885 57.15,23.885
NetC19_2: C19.2 R16.1 | length 1.9
  Top Layer w0.254: R16.1 62.425,35.9 C19.2
NetC20_1: C20.1 R1.1 R2.2 U1.4 | length 9.5
  Top Layer w0.254: R1.1 R2.2 31.84,15.95 33.409,17.519 33.409,18.609 ; U1.4 32.446,20.534 32.573,20.407 32.573,20.174 33.409,19.339 33.409,18.609 ; C20.1@34.707,17.435 34.582,17.435 33.409,18.609
NetD4_2: D4.2 F1.1 M1.2 | length 36.7
  Top Layer w0.254: D4.2@28.66,11.43 D4.2
  Bottom Layer w1: F1.1@14.676,43.14 22.225,35.591 22.225,20.32 22.86,19.685 M1.2 ; M1.2@22.86,17.145 D4.2@28.66,11.43
NetD5_1: D5.1 IC3.4 L3.2
NetIC1_7: IC1.7 R5.1 R6.2 | length 3.8
  Top Layer w0.254: R5.1 8.758,22.353 8.758,22.864 9.615,23.721 9.57,23.766 9.57,25.325 IC1.7
NetIC1_10: IC1.10 L1.1 R8.2 | length 16.2
  Top Layer w0.254: IC1.10 11.07,27.32 12.235,26.155 R8.2 13.26,26.325 14.53,27.595 20.195,27.595 20.195,31.315 L1.1@19.76,31.75
NetIC2_4: IC2.4 R12.2 R13.1 | length 5
  Top Layer w0.21: IC2.4 33.892,32.135
  Top Layer w0.254: 33.892,32.135 33.912,32.155 34.501,31.566 R13.1@34.501,30.838 ; R13.1@34.876,30.642 R12.2@36.363,30.642
NetIC2_15: IC2.15 R14.2 R15.1 | length 3.7
  Top Layer w0.21: 26.428,30.893 26.67,31.135 IC2.15
  Top Layer w0.254: R14.2@24.196,30.41 24.313,30.528 25.583,30.528 R15.1 25.949,30.893 26.428,30.893
NetIC3_1: IC3.1 R16.2 | length 3
  Top Layer w0.254: R16.2 60.775,33.038 IC3.1
NetIC3_2: IC3.2 R17.1 R18.2 | length 10.7
  Top Layer w0.254: R17.1 R18.2 58.59,26.125 60.18,27.715 61.789,27.715 IC3.2
NetLD1_2: LD1.2 R7.2 R20.2 | length 4.5
  Top Layer w0.254: R20.2 R7.2 1.815,19.57 1.815,18.505 LD1.2
NetLD2_1: LD2.1 R11.2 | length 37
  Top Layer w0.254: LD2.1 3.943,4.833 26.199,4.833 32.472,11.107 37.418,11.107 37.666,11.355 R11.2
NetM1_1: M1.1 pad.2@26.812,21.987 R19.2 U1.6 | length 12.2
  Top Layer w0.254: M1.1 26.543,18.294 28.594,20.345 30.419,20.345 30.546,20.472 U1.6 30.423,20.78 30.423,21.647 29.821,22.249 R19.2
  Bottom Layer w0.254: M1.1 25.4,20.496 26.437,21.533 pad.2@26.812,21.533
POW: C6.2 C13.2 C17.1 F1.2 IC2.1 IC2.11 IC2.13 IC3.5 L3.1 pad.2@10.866,46.99 U2.1 U2.3 | length 130.8
  Top Layer w0.21: 26.478,32.135 IC2.13
  Top Layer w0.254: v1(25.491,32.135) 26.478,32.135 ; v1(31.461,29.548) 31.461,29.57 31.995,30.104 IC2.1 ; C6.2@34.284,21.714 34.284,21.589 34.707,21.166 C6.2 C6.2@34.957,21.166
  Top Layer w0.35: C6.2@34.957,21.166 35.591,20.532 U2.3 ; 35.623,21.832 U2.1
  Top Layer w0.4: C6.2@34.957,21.166 35.623,21.832
  Top Layer w0.7: v1(23.924,34.635) C13.2 ; v1(33.655,24.765) 33.655,22.343 C6.2@34.284,21.714
  Bottom Layer w0.254: pad.2@10.646,46.99 10.866,46.99 33.27,46.99 36.83,43.43 F1.2 ; 25.261,34.635 25.491,34.405 v1(25.491,32.135) 25.491,32.07 28.013,29.548 v1(31.461,29.548) ; C17.1 C17.1@43.836,25.811
  Bottom Layer w0.7: v1(23.924,34.635) 25.261,34.635 ; 25.491,34.405 25.491,36.286 27.962,38.757 36.576,38.757 36.83,39.011 F1.2 ; v1(33.655,24.765) 35.778,26.888 35.778,30.063 38.735,33.02 38.735,41.297 ; F1.2@36.841,43.191 38.735,41.297 ; L3.1@40.727,39.305 38.735,41.297 ; L3.1 41.426,32.696 43.836,30.287 C17.1@43.836,25.811 ; C17.1 43.815,25.29 45.455,23.65 48.736,23.65 49.526,22.86 58.382,22.86 60.998,25.476 IC3.5
RESET: POWER.6
SCL: IOH.10
SDA: IOH.9
VIN: POWER.1
pads on no net: IC1.4 IC1.5 IC1.8 IC2.8 IC2.9 POWER.8 U1.1 U1.3 U2.2

## Polygon pours and split planes (outlines as drawn)
GND on Top Layer "Top Layer-No Net" (solid, pour order 0): 0,53.34 0,0 66.04,0 66.04,1.27 68.58,3.81 68.58,38.1 66.04,40.64 66.04,50.8 63.5,53.34
NetC18_1 on Top Layer "Top Layer-NetC18_1" (solid, pour order 30): 50.165,26.125 52.063,24.227 52.063,24.123 53.27,21.59 54.61,19.05 57.785,19.05 57.785,25.37 56.25,27.305 53.27,31.115 45.72,31.115 45.72,27.94 47.535,26.125
5V on Top Layer "Top Layer-5V" (solid, pour order 6): 41.923,21.584 41.91,21.59 38.735,21.59 38.735,20.828 44.112,20.828 44.811,21.527 44.811,22.359 48.26,22.359 48.26,21.023 49.53,19.753 49.53,16.51 44.45,16.51 41.91,13.97 38.735,13.97 38.735,8.255 49.53,8.255 51.387,8.842 51.387,22.588 49.504,24.472 44.811,24.472
POW on Top Layer "Top Layer-POW 1" (solid, pour order 28): 40.005,46.355 38.1,44.45 35.778,44.45 35.778,41.91 38.1,39.588 38.1,34.925 39.37,33.655 43.815,33.655 43.815,46.355
no net on Top Layer "Top Layer-No Net 1" (solid, pour order 18): 50.8,31.4
POW on Top Layer "Top Layer-POW" (solid, pour order 12): 27.94,33.001 27.94,33.269 27.762,33.447 25.949,33.447 25.949,34.925 24.765,34.925 24.765,33.135 24.899,33.001
NetC8_2 on Top Layer "Top Layer-NetC8_2" (solid, pour order 8): 39.955,21.59 38.775,21.59 39.46,26.432 39.116,26.776 39.116,27.97 39.99,27.97 40.64,27.32 40.64,25.055 40.64,24.472
NetC7_2 on Top Layer "Top Layer-NetC7_2" (solid, pour order 4): 38.735,20.32 46.355,20.32 46.355,20.407 46.99,21.042 46.99,22.225 48.26,22.225 48.26,20.955 49.53,19.685 49.53,16.92 44.45,16.92 42.32,19.05 38.735,19.05
GND on Bottom Layer "Bottom Layer-No Net" (solid, pour order 2): 0,53.34 0,0 66.18,0 66.04,0.14 66.04,1.27 68.58,3.81 68.58,38.1 66.04,40.64 66.04,50.94 63.64,53.34
NetC18_1 on Bottom Layer "Bottom Layer-NetC18_1" (solid, pour order 36): 46.355,30.48 46.355,27.305 54.61,19.05 57.785,19.05 57.785,23.594 50.899,30.48
NetD5_1 on Bottom Layer "Bottom Layer-NetD5_1" (solid, pour order 38): 56.776,30.48 58.779,34.847 63.649,31.115 66.189,28.575 66.189,26.432 63.684,26.432 62.88,27.236 57.076,27.236 55.683,28.628 56.776,29.722
no net on Bottom Layer "Bottom Layer-No Net 1" (solid, pour order 34): 45.72,31.115
no net on Bottom Layer "Bottom Layer-No Net 2" (solid, pour order 32): 48.26,30.48
NetD5_1 on Bottom Layer "Bottom Layer-NetD5_1 1" (solid, pour order 26): 59.055,28.575 59.055,45.72 58.42,46.355 54.61,46.355 54.61,29.653 55.688,28.575

## Other copper
Top Layer:
  region: 39.335,21.182
  region net 5V: 38.735,25.055 38.735,26.325 38.391,29.21 35.56,29.21 35.623,29.147 35.623,26.67 35.85,26.67 37.465,25.055
  region net NetC1_1: 3.58,27.172 5.715,27.172 5.715,28.62 4.445,28.62 3.58,27.97

## Silkscreen, mask and mechanical layers (free items; w line width, h text height)
Top Overlay:
  lines w0.254: 53.949,8.255 53.949,5.715 59.029,5.715 59.029,8.255 ; 53.949,8.255 59.029,8.255 ; 53.949,8.255 59.029,8.255 ; 53.949,8.255 53.949,10.795 ; 53.949,10.795 59.029,10.795 ; 53.949,10.795 53.949,13.335 59.029,13.335 59.029,10.795 ; 59.029,8.255 59.029,10.795 ; 1.49,45.72 6.57,45.72 6.57,48.26 1.49,48.26 1.49,45.72 ; 7.205,45.72 7.205,48.26 12.285,48.26 12.285,45.72 7.205,45.72 ; 23.151,20.717 28.231,20.717 28.231,23.257 23.151,23.257 23.151,20.717 ; 37.05,5.64 42.13,5.64 42.13,8.18 37.05,8.18 37.05,5.64
  text "Vbat" at 1.27,48.895 h0.8
  text "GND" at 5.5,48.895 h1
  text "POW" at 10.145,48.895 h0.8
  text "IO7" at 45.847,48.588 h0.51 r225
  text "IO6 ~" at 48.387,48.588 h0.51 r225
  text "IO5 ~" at 50.927,48.588 h0.51 r225
  text "IO4" at 53.467,48.588 h0.51 r225
  text "IO3 ~" at 56.007,48.588 h0.51 r225
  text "IO2" at 58.547,48.588 h0.51 r225
  text "IO1" at 61.087,48.588 h0.51 r225
  text "IO0" at 63.627,48.588 h0.51 r225
  text "IO10 ~" at 36.576,48.514 h0.51 r225
  text "IO9 ~" at 39.116,48.514 h0.51 r225
  text "IO8" at 41.656,48.514 h0.51 r225
  text "SDA" at 21.336,48.461 h0.51 r225
  text "SCL" at 18.796,48.334 h0.51 r225
  text "AREF" at 23.876,48.334 h0.51 r225
  text "GND" at 26.416,48.334 h0.51 r225
  text "IO13" at 28.956,48.334 h0.51 r225
  text "IO12" at 31.496,48.334 h0.51 r225
  text "IO11 ~" at 34.036,48.334 h0.51 r225
  text "Vout" at 26.67,27.305 h0.8
  text "Vs" at 23.495,23.842 h0.8
  text "Vg" at 26.416,23.842 h0.8
  text "35V" at 59.5,12.206 h0.7
  text "+9V" at 59.69,9.477 h0.7
  text "JP5V" at 37.666,8.842 h1
  text "GND" at 53.34,8.001 h1.2 r90
  text "-9V" at 59.69,6.91 h0.7
  text "IOREF" at 30.39,4.445 h0.51 r45
  text "RESET" at 33.02,4.445 h0.51 r45
  text "3v3" at 35.56,4.445 h0.51 r45
  text "5v" at 38.141,4.445 h0.51 r45
  text "GND" at 40.731,4.445 h0.51 r45
  text "GND" at 43.18,4.445 h0.51 r45
  text "Vin" at 45.72,4.445 h0.51 r45
  text "AD0" at 50.8,4.445 h0.51 r45
  text "AD3" at 58.42,4.445 h0.51 r45
  text "AD5" at 63.5,4.445 h0.51 r45
  text "AD1" at 53.34,4.408 h0.51 r45
  text "AD2" at 55.88,4.408 h0.51 r45
  text "AD4" at 60.96,4.408 h0.51 r45
Mechanical 1:
  circle w0.127: c15.24,50.8 r1.6
  circle w0.127: c66.04,7.6 r1.6
  circle w0.127: c13.97,2.54 r1.6
  lines w0.127: 66.04,0 0,0 0,53.34 63.5,53.34 66.04,50.8 66.04,40.64 68.58,38.1 68.58,3.81 ; 66.04,0.217 66.04,1.2 68.58,3.8

## Text inside footprints (layer, text, board x,y; h text height)
C17: Top Overlay "+" at 41.275,26.679 h2
C18: Top Overlay "+" at 55.742,23.333 h1 r270
U1: Top Overlay "*" at 30.425,17.533 h1.88 r90; Mechanical 4 "*" at 31.644,18.447 h1.88 r90; Mechanical 4 "*" at 31.644,18.447 h1.88 r90
U2: Top Overlay "*" at 36.478,22.121 h1.27; Mechanical 7 "Default Padstyle: r121_42" at 30.255,14.329 h1.27; Mechanical 7 "Pin One Padstyle: r121_42" at 30.255,12.805 h1.27; Mechanical 7 "Alt 1 Padstyle: b152_229h76" at 29.62,8.233 h1.27; Mechanical 7 "Alt 2 Padstyle: b229_152h76" at 29.62,6.709 h1.27; Mechanical 7 "0.069in/1.753mm" at 35.811,24.718 h0.64; Mechanical 7 "0.11in/2.794mm" at 35.97,26.623 h0.64; Mechanical 7 "0.114in/2.896mm" at 42.116,20.539 h0.64; Mechanical 7 "0.026in/0.65mm" at 29.556,21.189 h0.64; Mechanical 7 "0.02in/0.508mm" at 34.827,16.361 h0.64; Mechanical 13 "*" at 37.379,20.959 h1.27